# EAGLE board ReadyUNO-DIP-v1 (EAGLE 7.5.0)
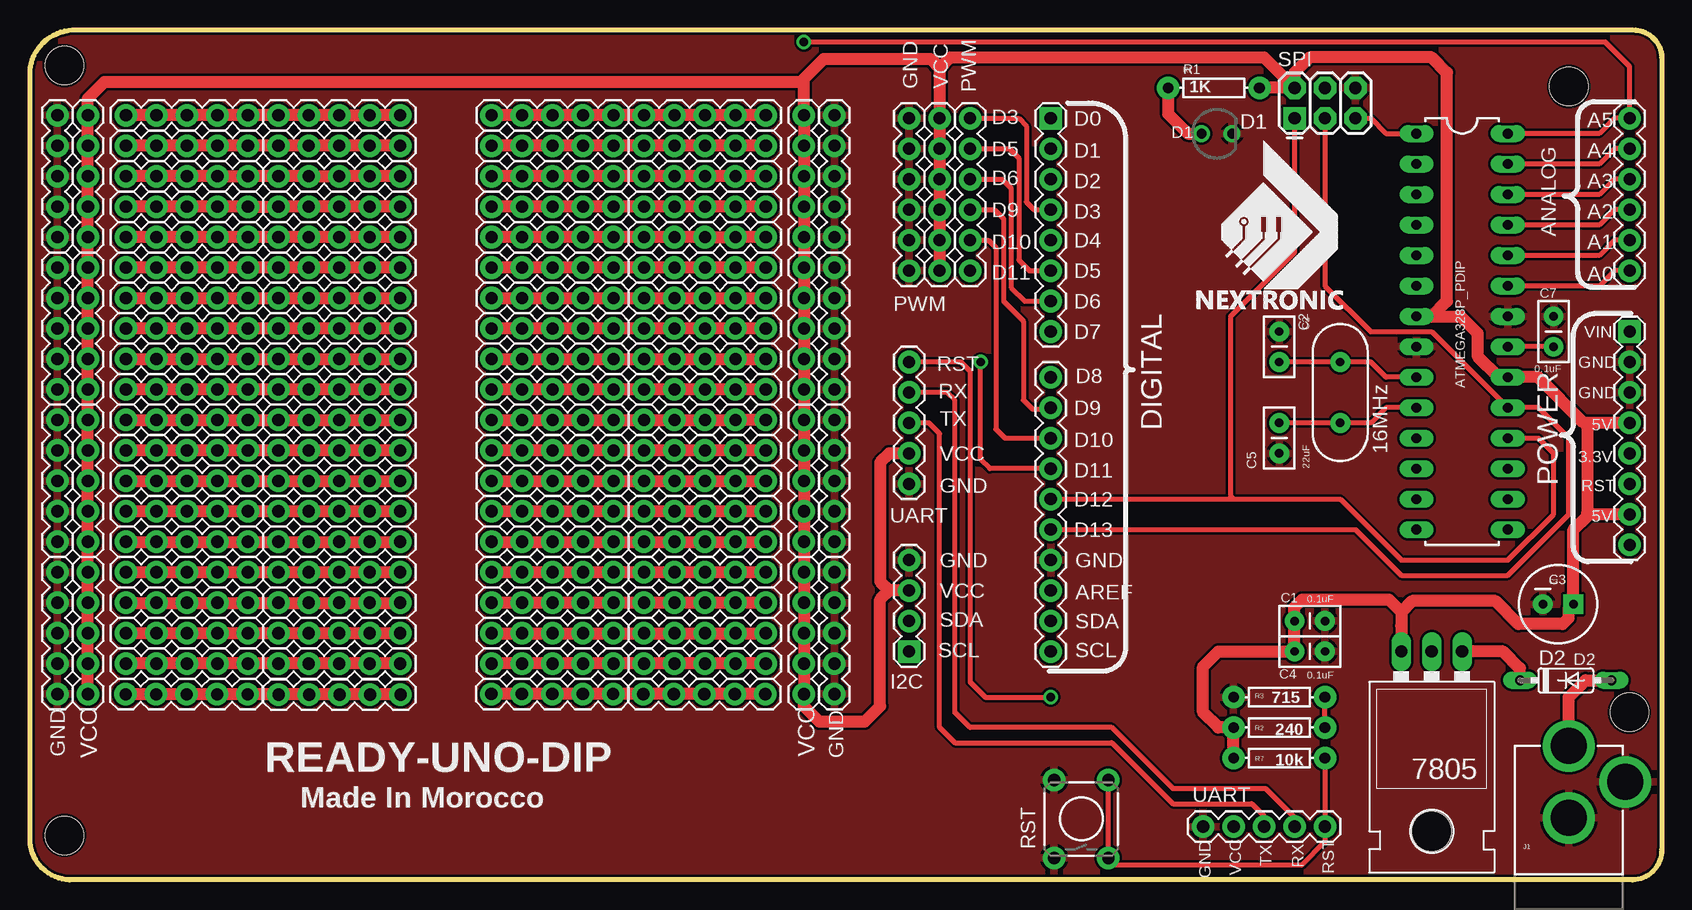
[diagram p0: board, top side]
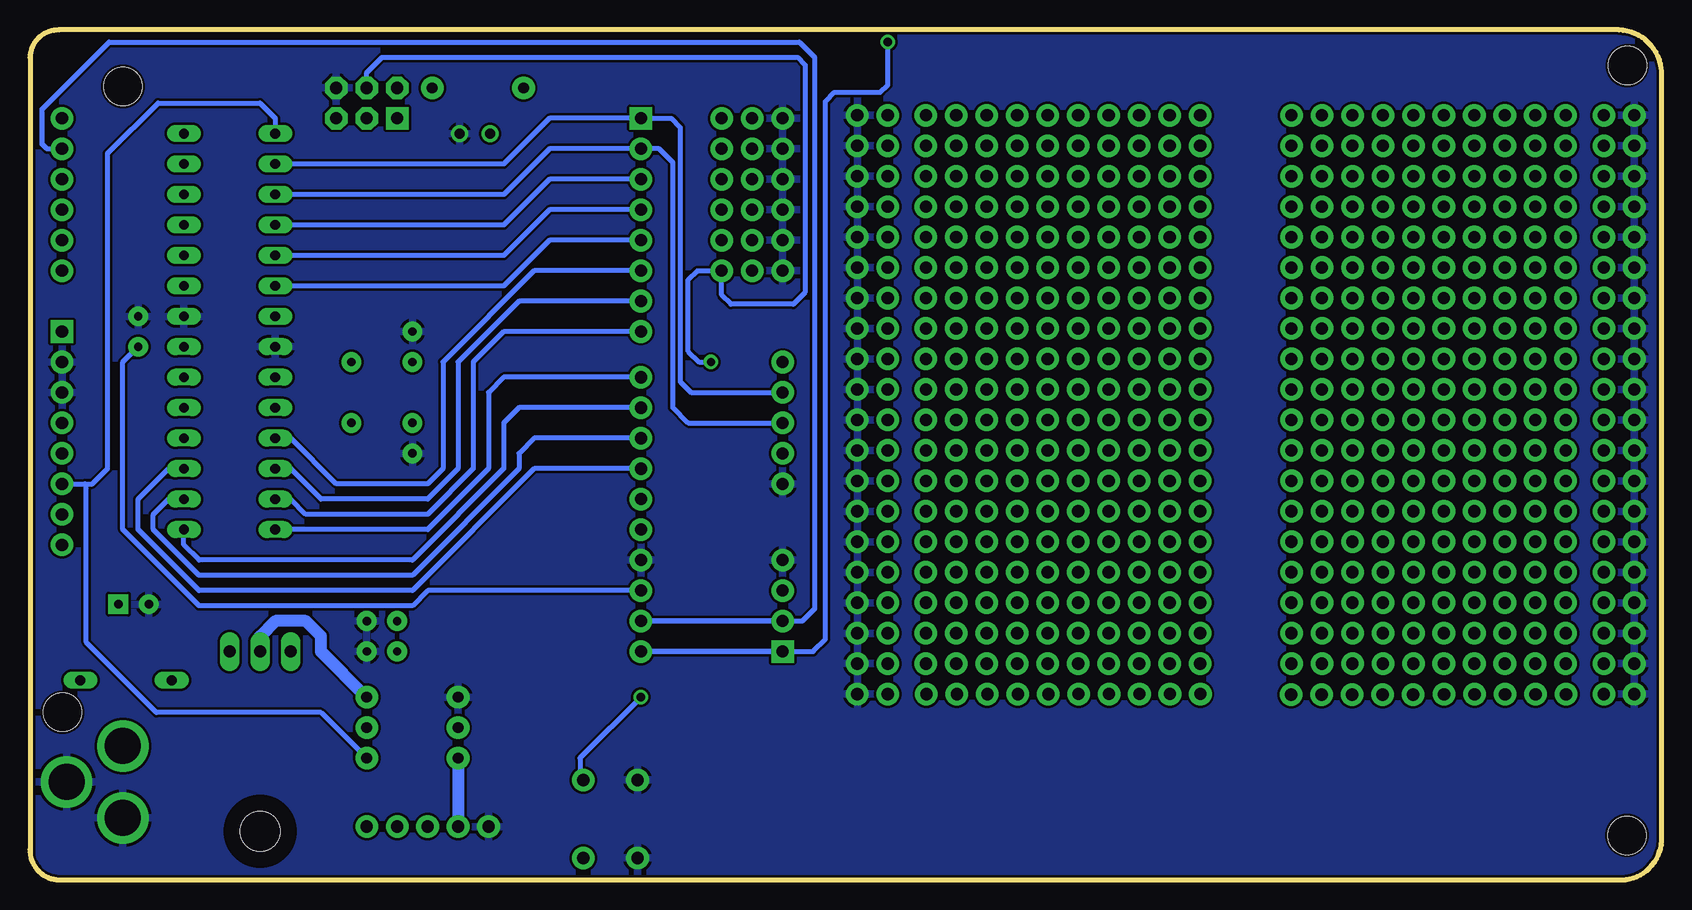
[diagram p1: board, bottom side, seen from below]

Size 136.02 x 70.87 mm. Coordinates in mm from the lower left corner, seen from the top.
Outline: 133.6,0 3.3,0 arc-90 0,3.56 0,67.06 arc-90 3.56,70.87 133.6,70.87 arc-90 136.02,68.58 136.02,2.54 arc-90 133.6,0
Copper layers (1*16): Top 0.035mm / dielectric 1.5mm / Bottom 0.035mm
Design rules "SparkFun": minimum track width 8mil, minimum drill 20mil, track to track 8mil, track to pad 8mil, pad to pad 8mil, via to via 8mil, smd to smd 8mil, copper to edge 8mil, drill to drill 8mil, minimum pad ring 12mil, minimum via ring 10mil, stop-mask expansion 4mil, vias tented up to drill 20mil, thermal gap 10mil
Net classes: 0 default: width 0.152 mm, drill 0.305 mm, clearance 0.152 mm
Holes 3.2 mm at 2.87,67.9 2.89,3.71 133.32,13.98 128.27,66.17

## Footprints (pad centres in the part's own frame; a part is rotated, then mirrored left to right if it is on the bottom)
TO-220-ALT = drill 1.016 long: GND 0,-3.81; IN -2.54,-3.81; OUT 2.54,-3.81 | hole 3.302: 0,11.176
1X06 = drill 1.016 pad 1.88: 1 0,0; 2 2.54,0; 3 5.08,0; 4 7.62,0; 5 10.16,0; 6 12.7,0
CAP-PTH-SMALLEZ = drill 0.7 pad 1.651: 1 0,0; 2 2.54,0
CPOL-RADIAL-100UF-25V = drill 0.7 pad 1.651 square: 1 1.27,0 | drill 0.7 pad 1.651: 2 -1.27,0
LED3MM-NS = drill 0.813: A -1.27,0; K 1.27,0
DIODE_DO35-7 = drill 0.813 long: A 3.81,0; C -3.81,0
1X08 = drill 1.016 pad 1.88 square: 1 0,0 | drill 1.016 pad 1.88: 2 2.54,0; 3 5.08,0; 4 7.62,0; 5 10.16,0; 6 12.7,0; 7 15.24,0; 8 17.78,0
1X10 = drill 1.016 pad 1.88: 1 0,0; 2 2.54,0; 3 5.08,0; 4 7.62,0; 5 10.16,0; 6 12.7,0; 7 15.24,0; 8 17.78,0; 9 20.32,0; 10 22.86,0
1X05 = drill 1.016 pad 1.88: 1 0,0; 2 2.54,0; 3 5.08,0; 4 7.62,0; 5 10.16,0
1X04 = drill 1.016 pad 1.88 square: 1 0,0 | drill 1.016 pad 1.88: 2 2.54,0; 3 5.08,0; 4 7.62,0
POWER_JACK_PTH = drill 2.997 pad 4.318: GND 0,7.7; GNDBREAK 4.7,10.7; PWR 0,13.7
2X3-NS = drill 1.016 pad 1.88 square: 1 -2.54,-1.27 | drill 1.016 pad 1.88 octagon: 2 -2.54,1.27; 3 0,-1.27; 4 0,1.27; 5 2.54,-1.27; 6 2.54,1.27
AXIAL-0.3 = drill 0.9 pad 1.88: P$1 -3.81,0; P$2 3.81,0
TACTILE-PTH = drill 1.016 pad 1.88: 1 -3.251,2.261; 2 3.251,2.261; 3 -3.251,-2.261; 4 3.251,-2.261
DIL28-3 = drill 0.813 long: 1 -16.51,-3.81; 2 -13.97,-3.81; 3 -11.43,-3.81; 4 -8.89,-3.81; 5 -6.35,-3.81; 6 -3.81,-3.81; 7 -1.27,-3.81; 8 1.27,-3.81; 9 3.81,-3.81; 10 6.35,-3.81; 11 8.89,-3.81; 12 11.43,-3.81; 13 13.97,-3.81; 14 16.51,-3.81; 15 16.51,3.81; 16 13.97,3.81; 17 11.43,3.81; 18 8.89,3.81; 19 6.35,3.81; 20 3.81,3.81; 21 1.27,3.81; 22 -1.27,3.81; 23 -3.81,3.81; 24 -6.35,3.81; 25 -8.89,3.81; 26 -11.43,3.81; 27 -13.97,3.81; 28 -16.51,3.81
HC49US = drill 0.7 pad 1.651: 1 -2.54,0; 2 2.54,0

## Placement (x,y rotation side)
7805  [TO-220-ALT]  116.84,15.24 180 top
ANALOG  [1X06]  133.35,50.8 90 top
C1  0.1uF  [CAP-PTH-SMALLEZ]  105.41,21.59 0 top
C2  22uF  [CAP-PTH-SMALLEZ]  104.14,45.72 270 top
C3  100uF  [CPOL-RADIAL-100UF-25V]  127.38,22.99 0 top
C4  0.1uF  [CAP-PTH-SMALLEZ]  105.41,19.05 0 top
C5  22uF  [CAP-PTH-SMALLEZ]  104.14,35.56 90 top
C7  0.1uF  [CAP-PTH-SMALLEZ]  127,44.45 90 top
D1  [LED3MM-NS]  98.93,62.23 0 top
D2  [DIODE_DO35-7]  128.02,16.64 0 top
DIGITAL  [1X08]  85.09,63.5 270 top
DIGITAL2  [1X10]  85.09,19.05 90 top
FRAME1  FRAME-LETTER  [CREATIVE_COMMONS]  20.7,-11.05 0 top  (outside the outline)
G2  [1X05]  2.29,38.35 270 top
G3  [1X05]  2.29,51.05 270 top
G5  [1X05]  2.29,63.75 270 top
G6  [1X05]  67.06,53.59 90 top
G7  [1X05]  67.06,40.89 90 top
G8  [1X05]  67.06,28.19 90 top
G9  [1X05]  67.06,15.49 90 top
G10  [1X05]  2.29,15.49 90 top
GND  [1X06]  73.28,63.5 270 top
I2C  [1X04]  73.28,19.05 90 top
J1  POWER_JACKPTH  [POWER_JACK_PTH]  128.27,-2.54 0 top
J2  AVR_SPI_PRG_6NS  [2X3-NS]  107.95,64.77 0 top
J3  [1X05]  51.18,58.67 0 top
J4  [1X05]  38.48,58.67 0 top
J5  [1X05]  8,61.21 0 top
J6  [1X05]  51.18,35.81 0 top
J7  [1X05]  38.48,35.81 0 top
J8  [1X05]  51.18,40.89 0 top
J9  [1X05]  38.48,40.89 0 top
J10  [1X05]  20.7,25.65 0 top
J11  [1X05]  8,25.65 0 top
J12  [1X05]  7.98,15.48 0 top
J13  [1X05]  38.48,25.65 0 top
J14  [1X05]  38.48,43.43 0 top
J15  [1X05]  8,40.89 0 top
J16  [1X05]  8,38.35 0 top
J17  [1X05]  20.7,35.81 0 top
J18  [1X05]  51.18,23.11 0 top
J19  [1X05]  48.64,23.11 180 top
J20  [1X05]  20.7,23.11 0 top
J21  [1X05]  20.7,40.89 0 top
J22  [1X05]  51.18,25.65 0 top
J23  [1X05]  38.48,30.73 0 top
J24  [1X05]  38.48,28.19 0 top
J25  [1X05]  8,45.97 0 top
J26  [1X05]  18.16,23.11 180 top
J27  [1X05]  51.18,20.57 0 top
J28  [1X05]  48.64,20.57 180 top
J29  [1X05]  20.7,38.35 0 top
J30  [1X05]  8,35.81 0 top
J31  [1X05]  51.18,43.43 0 top
J32  [1X05]  51.18,30.73 0 top
J33  [1X05]  51.18,28.19 0 top
J34  [1X05]  20.7,28.19 0 top
J35  [1X05]  8,28.19 0 top
J36  [1X05]  8,33.27 0 top
J37  [1X05]  38.48,51.05 0 top
J38  [1X05]  38.48,38.35 0 top
J39  [1X05]  51.18,45.97 0 top
J40  [1X05]  38.48,45.97 0 top
J41  [1X05]  20.7,45.97 0 top
J42  [1X05]  20.7,33.27 0 top
J43  [1X05]  20.7,30.73 0 top
J44  [1X05]  8,30.73 0 top
J45  [1X05]  20.7,51.05 0 top
J46  [1X05]  8,51.05 0 top
J47  [1X05]  51.18,48.51 0 top
J48  [1X05]  38.48,48.51 0 top
J49  [1X05]  20.7,48.51 0 top
J50  [1X05]  20.7,53.59 0 top
J51  [1X05]  8,53.59 0 top
J52  [1X05]  8,58.67 0 top
J53  [1X05]  8,48.51 0 top
J54  [1X05]  38.48,33.27 0 top
J55  [1X05]  51.18,53.59 0 top
J56  [1X05]  38.48,53.59 0 top
J57  [1X05]  51.18,56.13 0 top
J58  [1X05]  20.7,58.67 0 top
J59  [1X05]  20.7,43.43 0 top
J60  [1X05]  8,43.43 0 top
J61  [1X05]  51.18,33.27 0 top
J62  [1X05]  38.48,56.13 0 top
J63  [1X05]  51.18,61.21 0 top
J64  [1X05]  38.48,61.21 0 top
J65  [1X05]  20.7,61.21 0 top
J66  [1X05]  20.7,20.57 0 top
J67  [1X05]  20.7,56.13 0 top
J68  [1X05]  8,56.13 0 top
J69  [1X05]  18.16,20.57 180 top
J70  [1X05]  30.89,15.46 180 top
J71  [1X05]  51.18,51.05 0 top
J72  [1X05]  51.18,38.35 0 top
J73  [1X05]  38.46,15.51 0 top
J74  [1X05]  61.29,15.49 180 top
J76  [1X05]  38.48,63.75 0 top
J77  [1X05]  51.18,63.75 0 top
J78  [1X05]  20.7,63.75 0 top
J79  [1X05]  8,63.75 0 top
J87  [1X05]  8,18.03 0 top
J88  [1X05]  20.7,18.03 0 top
J89  [1X05]  38.48,18.03 0 top
J90  [1X05]  51.18,18.03 0 top
POWER  [1X08]  133.35,45.72 270 top
PWM  [1X06]  78.36,63.5 270 top
R1  1K  [AXIAL-0.3]  98.68,66.04 0 top
R2  240  [AXIAL-0.3]  104.14,12.7 180 top
R3  715  [AXIAL-0.3]  104.14,15.24 0 top
R7  10k  [AXIAL-0.3]  104.14,10.16 180 top
RST  RESET  [TACTILE-PTH]  87.63,5.08 90 top
U2  ATMEGA328P_PDIP  [DIL28-3]  119.38,45.72 270 top
UART  [1X05]  73.28,43.18 270 top
UART1  [1X05]  107.95,4.45 180 top
V0  [1X05]  4.83,40.89 90 top
V1  [1X05]  4.83,28.19 90 top
V5  [1X05]  64.52,53.59 90 top
V6  [1X05]  64.52,40.89 90 top
V7  [1X05]  64.52,28.19 90 top
V8  [1X05]  4.83,53.59 90 top
V9  [1X05]  64.52,15.49 90 top
V10  [1X05]  4.83,15.49 90 top
VCC  [1X06]  75.82,63.5 270 top
Y1  16MHz  [HC49US]  109.22,40.64 90 top

## Library data of the parts
7805 = SparkFun-PowerIC; OC_FARNELL: unknown; PROD_ID: VREG-08450; SF_ID: COM-00107
ANALOG GND PWM VCC = SparkFun-Connectors; OC_FARNELL: unknown; PROD_ID: CONN-08437
C1 C4 C7 = SparkFun-Capacitors; MF: MULTICOMP; MPN: MCRR25104X7RK0050; OC_FARNELL: 1216438
C2 C5 = SparkFun-Capacitors; MF: MULTICOMP; MPN: MCGPR100V226M8X11; OC_FARNELL: 9451579
C3 = SparkFun-Capacitors; MF: MULTICOMP; MPN: MCGPR25V107M6.3X11; OC_FARNELL: 9451188
D1 = SparkFun-LED; OC_FARNELL: unknown
D2 = eagle-ltspice; SPICEMODEL: NONE; SPICEPREFIX: D; SPICETYPE: diode
DIGITAL POWER = SparkFun-Connectors; OC_FARNELL: unknown; PROD_ID: CONN-08438
DIGITAL2 = SparkFun-Connectors; OC_FARNELL: unknown; PROD_ID: CONN-11563
FRAME1 = SparkFun-Aesthetics
G2 G3 G5-G10 J2-J74 J76-J79 J87-J90 UART UART1 V0 V1 V5-V10 = SparkFun-Connectors; OC_FARNELL: unknown
I2C = SparkFun-Connectors; OC_FARNELL: unknown; PROD_ID: CONN-09696
J1 = SparkFun-Connectors; OC_FARNELL: unknown; PROD_ID: CONN-08197
R1 = SparkFun-Resistors; MF: MULTICOMP; MPN: MCRE000037; OC_FARNELL: 1700237
R2 = SparkFun-Resistors; MF: WELWYN; MPN: MFR4-240RFI; OC_FARNELL: 1099876
R3 = SparkFun-Resistors; MF: TE CONNECTIVITY / NEOHM; MPN: YR1B715RCC; OC_FARNELL: 1083234
R7 = SparkFun-Resistors; OC_FARNELL: unknown
RST = SparkFun-Retired; OC_FARNELL: unknown
U2 = SparkFun-DigitalIC; MF: ATMEL; MPN: ATMEGA328-PU; OC_FARNELL: 1972087
Y1 = SparkFun-FreqCtrl; MF: RALTRON; MPN: AS-16.000-18; OC_FARNELL: 1611761

## Nets
3.3V: POWER.5
5V: 7805.OUT C1.1 C3.1 C4.1 I2C.3 J2.2 POWER.4 POWER.7 R1.P$2 R2.P$2 R7.P$2 U2.7 U2.20 UART1.4 UART.4 V0.1 V0.2 V0.3 V0.4 V0.5 V1.1 V1.2 V1.3 V1.4 V1.5 V5.1 V5.2 V5.3 V5.4 V5.5 V6.1 V6.2 V6.3 V6.4 V6.5 V7.1 V7.2 V7.3 V7.4 V7.5 V8.1 V8.2 V8.3 V8.4 V8.5 V9.1 V9.2 V9.3 V9.4 V9.5 V10.1 V10.2 V10.3 V10.4 V10.5 VCC.1 VCC.2 VCC.3 VCC.4 VCC.5 VCC.6
AD0: ANALOG.1 U2.23
AD1: ANALOG.2 U2.24
AD2: ANALOG.3 U2.25
AD3: ANALOG.4 U2.26
AD4: ANALOG.5 DIGITAL2.2 I2C.2 U2.27
AD5: ANALOG.6 DIGITAL2.1 I2C.1 U2.28
AREF: C7.1 DIGITAL2.3 U2.21
GND: C1.2 C2.1 C3.2 C4.2 C5.1 C7.2 D1.K DIGITAL2.4 G2.1 G2.2 G2.3 G2.4 G2.5 G3.1 G3.2 G3.3 G3.4 G3.5 G5.1 G5.2 G5.3 G5.4 G5.5 G6.1 G6.2 G6.3 G6.4 G6.5 G7.1 G7.2 G7.3 G7.4 G7.5 G8.1 G8.2 G8.3 G8.4 G8.5 G9.1 G9.2 G9.3 G9.4 G9.5 G10.1 G10.2 G10.3 G10.4 G10.5 GND.1 GND.2 GND.3 GND.4 GND.5 GND.6 I2C.4 J1.GND J1.GNDBREAK J2.6 POWER.2 POWER.3 R3.P$1 RST.1 RST.2 U2.8 U2.22 UART1.5 UART.5
IO2: DIGITAL.3 U2.4
IO3: DIGITAL.4 PWM.1 U2.5
IO4: DIGITAL.5 U2.6
IO5: DIGITAL.6 PWM.2 U2.11
IO6: DIGITAL.7 PWM.3 U2.12
IO7: DIGITAL.8 U2.13
IO8: DIGITAL2.10 U2.14
IO9: DIGITAL2.9 PWM.4 U2.15
MISO: DIGITAL2.6 J2.1 U2.18
MOSI: DIGITAL2.7 J2.4 PWM.6 U2.17
N$1: 7805.GND R2.P$1 R3.P$2
N$2: J18.1 J18.2 J18.3 J18.4 J18.5 J19.1 J19.2 J19.3 J19.4 J19.5
N$3: J87.1 J87.2 J87.3 J87.4 J87.5 J88.1 J88.2 J88.3 J88.4 J88.5
N$4: D1.A R1.P$1
N$5: J89.1 J89.2 J89.3 J89.4 J89.5 J90.1 J90.2 J90.3 J90.4 J90.5
N$6: J37.1 J37.2 J37.3 J37.4 J37.5 J71.1 J71.2 J71.3 J71.4 J71.5
N$7: C2.2 U2.9 Y1.2
N$8: C5.2 U2.10 Y1.1
N$9: J3.1 J3.2 J3.3 J3.4 J3.5 J4.1 J4.2 J4.3 J4.4 J4.5
N$10: J20.1 J20.2 J20.3 J20.4 J20.5 J26.1 J26.2 J26.3 J26.4 J26.5
N$11: J10.1 J10.2 J10.3 J10.4 J10.5 J11.1 J11.2 J11.3 J11.4 J11.5
N$12: J76.1 J76.2 J76.3 J76.4 J76.5 J77.1 J77.2 J77.3 J77.4 J77.5
N$13: J27.1 J27.2 J27.3 J27.4 J27.5 J28.1 J28.2 J28.3 J28.4 J28.5
N$14: J25.1 J25.2 J25.3 J25.4 J25.5 J41.1 J41.2 J41.3 J41.4 J41.5
N$15: J78.1 J78.2 J78.3 J78.4 J78.5 J79.1 J79.2 J79.3 J79.4 J79.5
N$16: J66.1 J66.2 J66.3 J66.4 J66.5 J69.1 J69.2 J69.3 J69.4 J69.5
N$17: J45.1 J45.2 J45.3 J45.4 J45.5 J46.1 J46.2 J46.3 J46.4 J46.5
N$18: D2.A J1.PWR
N$19: J47.1 J47.2 J47.3 J47.4 J47.5 J48.1 J48.2 J48.3 J48.4 J48.5
N$20: J12.1 J12.2 J12.3 J12.4 J12.5 J70.1 J70.2 J70.3 J70.4 J70.5
N$21: J73.1 J73.2 J73.3 J73.4 J73.5 J74.1 J74.2 J74.3 J74.4 J74.5
N$22: J54.1 J54.2 J54.3 J54.4 J54.5 J61.1 J61.2 J61.3 J61.4 J61.5
N$23: J38.1 J38.2 J38.3 J38.4 J38.5 J72.1 J72.2 J72.3 J72.4 J72.5
N$24: J24.1 J24.2 J24.3 J24.4 J24.5 J33.1 J33.2 J33.3 J33.4 J33.5
N$25: J23.1 J23.2 J23.3 J23.4 J23.5 J32.1 J32.2 J32.3 J32.4 J32.5
N$26: J67.1 J67.2 J67.3 J67.4 J67.5 J68.1 J68.2 J68.3 J68.4 J68.5
N$27: J49.1 J49.2 J49.3 J49.4 J49.5 J53.1 J53.2 J53.3 J53.4 J53.5
N$28: J59.1 J59.2 J59.3 J59.4 J59.5 J60.1 J60.2 J60.3 J60.4 J60.5
N$29: J14.1 J14.2 J14.3 J14.4 J14.5 J31.1 J31.2 J31.3 J31.4 J31.5
N$30: J17.1 J17.2 J17.3 J17.4 J17.5 J30.1 J30.2 J30.3 J30.4 J30.5
N$31: J52.1 J52.2 J52.3 J52.4 J52.5 J58.1 J58.2 J58.3 J58.4 J58.5
N$32: J50.1 J50.2 J50.3 J50.4 J50.5 J51.1 J51.2 J51.3 J51.4 J51.5
N$33: J16.1 J16.2 J16.3 J16.4 J16.5 J29.1 J29.2 J29.3 J29.4 J29.5
N$34: J43.1 J43.2 J43.3 J43.4 J43.5 J44.1 J44.2 J44.3 J44.4 J44.5
N$35: J15.1 J15.2 J15.3 J15.4 J15.5 J21.1 J21.2 J21.3 J21.4 J21.5
N$36: J36.1 J36.2 J36.3 J36.4 J36.5 J42.1 J42.2 J42.3 J42.4 J42.5
N$37: J13.1 J13.2 J13.3 J13.4 J13.5 J22.1 J22.2 J22.3 J22.4 J22.5
N$38: J6.1 J6.2 J6.3 J6.4 J6.5 J7.1 J7.2 J7.3 J7.4 J7.5
N$39: J8.1 J8.2 J8.3 J8.4 J8.5 J9.1 J9.2 J9.3 J9.4 J9.5
N$40: J34.1 J34.2 J34.3 J34.4 J34.5 J35.1 J35.2 J35.3 J35.4 J35.5
N$41: J39.1 J39.2 J39.3 J39.4 J39.5 J40.1 J40.2 J40.3 J40.4 J40.5
N$42: J5.1 J5.2 J5.3 J5.4 J5.5 J65.1 J65.2 J65.3 J65.4 J65.5
N$43: J63.1 J63.2 J63.3 J63.4 J63.5 J64.1 J64.2 J64.3 J64.4 J64.5
N$44: J57.1 J57.2 J57.3 J57.4 J57.5 J62.1 J62.2 J62.3 J62.4 J62.5
N$45: J55.1 J55.2 J55.3 J55.4 J55.5 J56.1 J56.2 J56.3 J56.4 J56.5
N$46: 7805.IN D2.C
RESET: J2.5 POWER.6 R7.P$1 RST.3 RST.4 U2.1 UART1.1 UART.1
RX-I: DIGITAL.1 U2.2 UART1.2 UART.2
SCK: DIGITAL2.5 J2.3 U2.19
SS: DIGITAL2.8 PWM.5 U2.16
TX-O: DIGITAL.2 U2.3 UART1.3 UART.3
VIN: POWER.1

## Tracks (layer width: path | path; a pad name or v marks a point on that pad's centre or on a via)
5V
  Top 0.406: 114.43,21.34 114.3,21.21
  Top 1.016: J2.2 R1.P$2 | POWER.4 129.79,38.1 | 129.79,38.1 129.54,38.1 125.73,41.91 U2.20 122.43,41.91 120.65,43.69 120.65,45.59 119.25,46.99 116.84,46.99 | 75.82,67.69 VCC.1 VCC.2 VCC.3 VCC.4 VCC.5 VCC.6 | J2.2 102.87,68.58 76.71,68.58 75.82,67.69 | 7805.OUT 114.3,21.21 114.3,22.35 | U2.7 116.84,46.99 | 116.84,46.99 118.11,48.26 118.11,67.31 116.84,68.58 106.68,68.58 105.41,67.31 J2.2 | R7.P$2 R2.P$2 99.06,12.7 97.79,13.97 97.79,17.78 99.06,19.05 C4.1 C1.1 105.41,22.73 106.05,23.37 113.28,23.37 114.3,22.35 | V7.4 V7.5 V6.1 V6.2 V6.3 V6.4 V6.5 V5.1 V5.2 V5.3 V5.4 V5.5 64.52,66.17 | V7.4 V7.3 V7.2 V7.1 V9.5 V9.4 V9.3 V9.2 V9.1 | I2C.3 71.63,24.13 | 71.63,24.13 70.87,23.37 70.87,14.48 69.6,13.21 65.79,13.21 64.52,14.48 V9.1 | V7.4 V9.1 | UART.4 71.63,35.56 70.87,34.8 70.87,24.89 71.63,24.13 | V10.1 V10.2 V10.3 V10.4 V10.5 V1.1 V1.2 V1.3 V1.4 V1.5 V0.1 V0.2 V0.3 V0.4 V0.5 V8.1 V8.2 V8.3 V8.4 V8.5 4.83,65.15 6.22,66.55 64.13,66.55 64.52,66.17 | 64.52,66.17 64.52,66.8 66.17,68.45 75.06,68.45 75.82,67.69 | 129.79,38.1 129.79,30.61 | 129.79,30.61 129.79,30.35 128.65,29.21 C3.1 128.27,22.61 128.27,21.84 127.76,21.34 124.08,21.34 122.17,23.24 115.19,23.24 114.3,22.35 | POWER.7 129.92,30.48 129.79,30.61
  Bottom 1.016: R7.P$2 UART1.4
AD0
  Top 0.406: ANALOG.1 132.08,50.8 130.81,49.53 U2.23
AD1
  Top 0.406: ANALOG.2 132.08,53.34 130.81,52.07 U2.24
AD2
  Top 0.406: ANALOG.3 132.08,55.88 130.81,54.61 U2.25
AD3
  Top 0.406: ANALOG.4 132.08,58.42 130.81,57.15 U2.26
AD4
  Top 0.406: ANALOG.5 132.08,60.96 130.81,59.69 U2.27
  Bottom 0.406: I2C.2 DIGITAL2.2 71.63,21.59 70.61,22.61 70.61,68.58 71.88,69.85 129.41,69.85 135,64.26 135,61.34 134.62,60.96 ANALOG.5
AD5  (via drill 0.7)
  Top 0.406: U2.28 130.81,62.23 132.08,63.5 ANALOG.6 133.35,67.82 131.32,69.85 v64.52,69.85
  Bottom 0.406: I2C.1 DIGITAL2.1 70.74,19.05 69.72,20.07 69.72,64.9 68.96,65.66 65.15,65.66 64.52,66.29 v64.52,69.85
AREF
  Top 0.406: C7.1 U2.21
  Bottom 0.406: DIGITAL2.3 102.87,24.13 104.14,22.86 121.92,22.86 122.24,23.18 128.27,29.21 128.27,43.18 C7.1
GND
  pour Top: 0.25,71.12 136.14,70.74 135.51,-0.25 0,0
  pour Bottom: 0.13,70.61 136.4,70.99 135.51,-0.25 0,0
IO2
  Bottom 0.406: DIGITAL.3 92.71,58.42 96.52,54.61 U2.4
IO3
  Top 0.406: PWM.1 82.42,63.5 83.06,62.87 83.06,56.51 83.69,55.88 DIGITAL.4
  Bottom 0.406: DIGITAL.4 92.71,55.88 96.52,52.07 U2.5
IO4
  Bottom 0.406: DIGITAL.5 92.71,53.34 96.52,49.53 U2.6
IO5
  Top 0.406: DIGITAL.6 83.31,50.8 82.42,51.69 82.42,60.2 81.66,60.96 PWM.2
  Bottom 0.406: DIGITAL.6 93.98,50.8 101.6,43.18 101.6,34.29 102.87,33.02 110.49,33.02 114.3,36.83 U2.11
IO6
  Top 0.406: PWM.3 81.03,58.42 81.79,57.66 81.79,49.4 82.93,48.26 DIGITAL.7
  Bottom 0.406: DIGITAL.7 95.25,48.26 100.33,43.18 100.33,34.29 102.87,31.75 111.76,31.75 114.3,34.29 U2.12
IO7
  Bottom 0.406: DIGITAL.8 96.52,45.72 99.06,43.18 99.06,34.29 102.87,30.48 113.03,30.48 114.3,31.75 U2.13
IO8
  Bottom 0.406: DIGITAL2.10 96.52,41.91 97.79,40.64 97.79,34.29 102.87,29.21 U2.14
IO9
  Top 0.406: PWM.4 80.39,55.88 81.15,55.12 81.15,48.26 82.8,46.61 82.8,40.01 83.57,39.24 84.96,39.24 DIGITAL2.9
  Bottom 0.406: DIGITAL2.9 95.25,39.37 96.52,38.1 96.52,34.29 104.14,26.67 121.92,26.67 123.19,27.94 U2.15
MISO
  Top 0.406: DIGITAL2.6 100.33,31.75 | 100.33,31.75 109.22,31.75 114.3,26.67 123.19,26.67 127,30.48 127,35.56 125.73,36.83 U2.18 | J2.1 105.41,52.32 100.08,46.99 100.08,32 100.33,31.75
MOSI  (via drill 0.7)
  Top 0.406: DIGITAL2.7 80.01,34.29 79.25,35.05 v79.25,43.18
  Bottom 0.406: DIGITAL2.7 93.98,34.29 104.14,24.13 121.92,24.13 127,29.21 127,31.75 124.46,34.29 U2.17 | J2.4 107.95,67.31 106.68,68.58 72.01,68.58 71.37,67.94 71.37,49.02 72.39,48.01 77.6,48.01 78.36,48.77 PWM.6 80.39,50.8 81.15,50.04 81.15,44.07 80.26,43.18 v79.25,43.18
N$1
  Top 0.406: R2.P$1 R3.P$2
  Bottom 1.016: R3.P$2 111.76,19.05 111.76,20.32 113.03,21.59 115.57,21.59 116.84,20.32 7805.GND
N$2
  Top 1.016: J18.5 J18.4 J18.3 J18.2 J18.1 J19.1 J19.2 J19.3 J19.4 J19.5
N$3
  Top 1.016: J88.5 J88.4 J88.3 J88.2 J88.1 J87.5 J87.4 J87.3 J87.2 J87.1
N$4
  Top 1.016: R1.P$1 94.87,63.88 96.52,62.23 D1.A
N$5
  Top 1.016: J90.5 J90.4 J90.3 J90.2 J90.1 J89.5 J89.4 J89.3 J89.2 J89.1
N$6
  Top 1.016: J71.5 J71.4 J71.3 J71.2 J71.1 J37.5 J37.4 J37.3 J37.2 J37.1
N$7
  Top 0.406: U2.9 113.03,41.91 111.76,43.18 Y1.2 C2.2
N$8
  Top 0.406: U2.10 113.03,39.37 111.76,38.1 Y1.1 C5.2
N$9
  Top 1.016: J3.5 J3.4 J3.3 J3.2 J3.1 J4.5 J4.4 J4.3 J4.2 J4.1
N$10
  Top 1.016: J26.5 J26.4 J26.3 J26.2 J26.1 J20.1 J20.2 J20.3 J20.4 J20.5
N$11
  Top 1.016: J10.5 J10.4 J10.3 J10.2 J10.1 J11.5 J11.4 J11.3 J11.2 J11.1
N$12
  Top 1.016: J77.5 J77.4 J77.3 J77.2 J77.1 J76.5 J76.4 J76.3 J76.2 J76.1
N$13
  Top 1.016: J28.5 J28.4 J28.3 J28.2 J28.1 J27.1 J27.2 J27.3 J27.4 J27.5
N$14
  Top 1.016: J41.5 J41.4 J41.3 J41.2 J41.1 J25.5 J25.4 J25.3 J25.2 J25.1
N$15
  Top 1.016: J78.5 J78.4 J78.3 J78.2 J78.1 J79.5 J79.4 J79.3 J79.2 J79.1
N$16
  Top 1.016: J66.5 J66.4 J66.3 J66.2 J66.1 J69.1 J69.2 J69.3 J69.4 J69.5
N$17
  Top 1.016: J45.5 J45.4 J45.3 J45.2 J45.1 J46.5 J46.4 J46.3 J46.2 J46.1
N$18
  Top 1.016: J1.PWR 128.27,15.24 129.67,16.64 D2.A
N$19
  Top 1.016: J48.1 J48.2 J48.3 J48.4 J48.5 J47.1 J47.2 J47.3 J47.4 J47.5
N$20
  Top 1.016: J70.1 J70.2 J70.3 J70.4 J70.5 18.16,15.46 J12.5 J12.4 J12.3 J12.2 J12.1
N$21
  Top 1.016: J74.1 J74.2 J74.3 J74.4 J74.5 48.63,15.49 J73.5 J73.4 J73.3 J73.2 J73.1
N$22
  Top 1.016: J54.1 J54.2 J54.3 J54.4 J54.5 J61.1 J61.2 J61.3 J61.4 J61.5
N$23
  Top 1.016: J38.1 J38.2 J38.3 J38.4 J38.5 J72.1 J72.2 J72.3 J72.4 J72.5
N$24
  Top 1.016: J24.1 J24.2 J24.3 J24.4 J24.5 J33.1 J33.2 J33.3 J33.4 J33.5
N$25
  Top 1.016: J32.5 J32.4 J32.3 J32.2 J32.1 J23.5 J23.4 J23.3 J23.2 J23.1
N$26
  Top 1.016: J67.5 J67.4 J67.3 J67.2 J67.1 J68.5 J68.4 J68.3 J68.2 J68.1
N$27
  Top 1.016: J53.1 J53.2 J53.3 J53.4 J53.5 J49.1 J49.2 J49.3 J49.4 J49.5
N$28
  Top 1.016: J60.1 J60.2 J60.3 J60.4 J60.5 J59.1 J59.2 J59.3 J59.4 J59.5
N$29
  Top 1.016: J14.1 J14.2 J14.3 J14.4 J14.5 J31.1 J31.2 J31.3 J31.4 J31.5
N$30
  Top 1.016: J17.5 J17.4 J17.3 J17.2 J17.1 J30.5 J30.4 J30.3 J30.2 J30.1
N$31
  Top 1.016: J58.5 J58.4 J58.3 J58.2 J58.1 J52.5 J52.4 J52.3 J52.2 J52.1
N$32
  Top 1.016: J50.5 J50.4 J50.3 J50.2 J50.1 J51.5 J51.4 J51.3 J51.2 J51.1
N$33
  Top 1.016: J16.1 J16.2 J16.3 J16.4 J16.5 J29.1 J29.2 J29.3 J29.4 J29.5
N$34
  Top 1.016: J43.5 J43.4 J43.3 J43.2 J43.1 J44.5 J44.4 J44.3 J44.2 J44.1
N$35
  Top 1.016: J21.5 J21.4 J21.3 J21.2 J21.1 J15.5 J15.4 J15.3 J15.2 J15.1
N$36
  Top 1.016: J36.1 J36.2 J36.3 J36.4 J36.5 J42.1 J42.2 J42.3 J42.4 J42.5
N$37
  Top 1.016: J22.5 J22.4 J22.3 J22.2 J22.1 J13.5 J13.4 J13.3 J13.2 J13.1
N$38
  Top 1.016: J6.5 J6.4 J6.3 J6.2 J6.1 J7.5 J7.4 J7.3 J7.2 J7.1
N$39
  Top 1.016: J8.5 J8.4 J8.3 J8.2 J8.1 J9.5 J9.4 J9.3 J9.2 J9.1
N$40
  Top 1.016: J35.1 J35.2 J35.3 J35.4 J35.5 J34.1 J34.2 J34.3 J34.4 J34.5
N$41
  Top 1.016: J39.5 J39.4 J39.3 J39.2 J39.1 J40.5 J40.4 J40.3 J40.2 J40.1
N$42
  Top 1.016: J65.5 J65.4 J65.3 J65.2 J65.1 J5.5 J5.4 J5.3 J5.2 J5.1
N$43
  Top 1.016: J63.5 J63.4 J63.3 J63.2 J63.1 J64.5 J64.4 J64.3 J64.2 J64.1
N$44
  Top 1.016: J57.5 J57.4 J57.3 J57.2 J57.1 J62.5 J62.4 J62.3 J62.2 J62.1
N$45
  Top 1.016: J55.5 J55.4 J55.3 J55.2 J55.1 J56.5 J56.4 J56.3 J56.2 J56.1
N$46
  Top 1.016: D2.C 124.21,17.65 122.81,19.05 7805.IN
RESET  (via drill 0.7)
  Top 0.406: J2.5 111.76,63.5 113.03,62.23 U2.1 | R7.P$1 UART1.1 107.95,3.17 106.05,1.27 90.45,1.27 RST.3 RST.4 | v85.09,15.24 79.63,15.24 78.36,16.51 78.36,42.42 77.6,43.18 UART.1
  Bottom 0.406: POWER.6 131.44,33.02 | 131.44,33.02 130.81,33.02 129.54,34.29 129.54,60.58 125.35,64.77 116.84,64.77 116.71,64.64 115.57,63.5 U2.1 | R7.P$1 111.76,13.97 125.48,13.97 131.32,19.81 131.32,32.89 131.44,33.02 | RST.4 90.17,8.61 90.17,10.16 v85.09,15.24
RX-I
  Top 0.406: UART1.2 105.41,5.21 103,7.62 95.25,7.62 90.17,12.7 78.36,12.7 77.09,13.97 77.09,40.01 76.45,40.64 UART.2
  Bottom 0.406: U2.2 96.52,59.69 92.71,63.5 DIGITAL.1 82.55,63.5 81.79,62.74 81.79,41.53 80.9,40.64 UART.2
SCK
  Top 0.406: DIGITAL2.5 110.49,29.21 114.3,25.4 123.19,25.4 128.27,30.48 128.27,36.83 125.73,39.37 U2.19 116.84,45.72 111.76,45.72 107.95,49.53 J2.3
SS
  Top 0.406: PWM.5 79.88,53.34 80.52,52.7 80.52,37.59 81.28,36.83 DIGITAL2.8
  Bottom 0.406: DIGITAL2.8 93.98,36.83 95.25,35.56 95.25,34.29 104.14,25.4 121.92,25.4 125.73,29.21 125.73,30.48 124.46,31.75 U2.16
TX-O
  Top 0.406: UART1.3 102.87,5.33 101.85,6.35 95.25,6.35 90.17,11.43 77.09,11.43 75.82,12.7 75.82,37.21 74.93,38.1 UART.3
  Bottom 0.406: U2.3 96.52,57.15 92.71,60.96 DIGITAL.2 83.57,60.96 82.42,59.82 82.42,39.37 81.15,38.1 UART.3

## Text on the board
tPlace: R1 | SPI | PWM | D3 | D0 | A5 | D1 | D5 | D1 | A4 | D6 | D2 | A3 | D9 | D3 | A2 | D10 | D4 | A1 | D11 | D5 | A0 | C7 | D6 | DIGITAL | D7 | C2 | VIN | RST | GND | D8 | RX | GND | D9 | TX | 5V | D10 | VCC | 3.3V | D11 | POWER | GND | RST | D12 | 5V | D13 | GND | GND | C3 | VCC | AREF | SDA | SDA | SCL | SCL | D2 | GND | VCC | VCC | GND | READY-UNO-DIP | Made In Morocco | UART | TX | RX | GND | VCC | RST